# EAGLE board MCU_IOexpander_layout.PCB (EAGLE 9.6.2), part 1 of 2
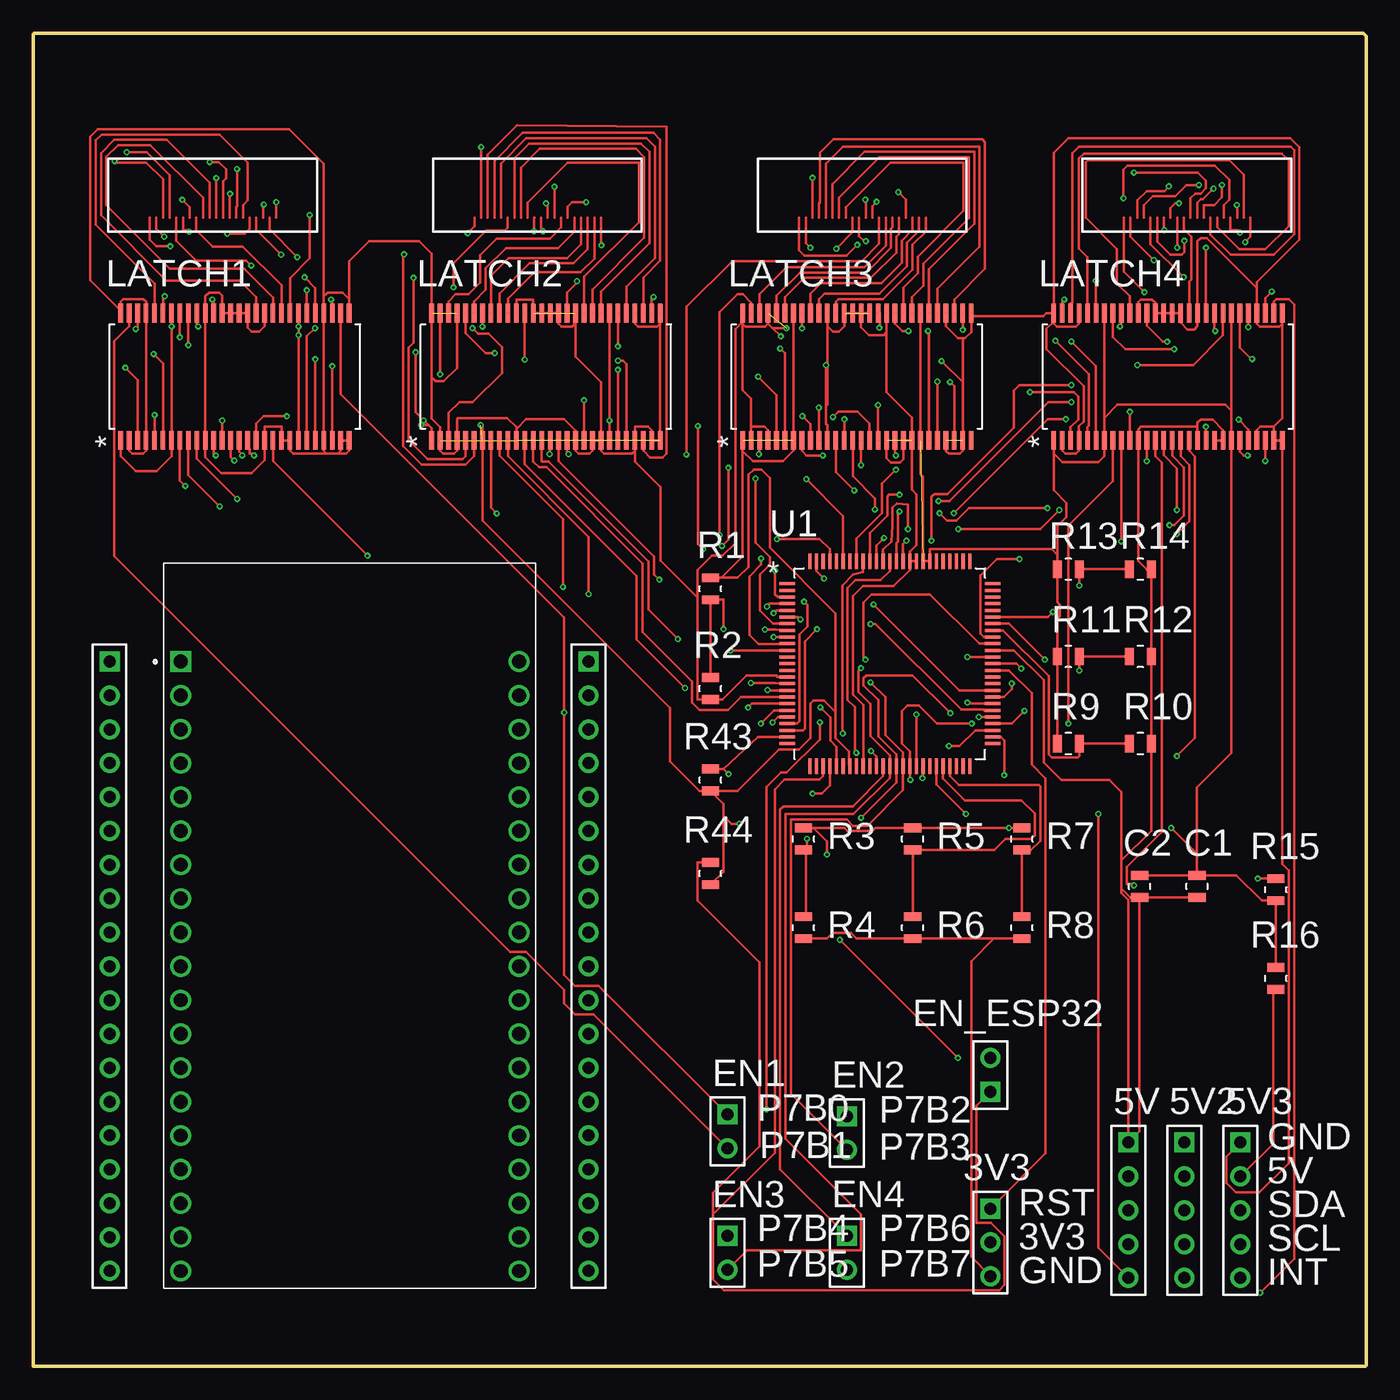
[diagram p0: board, top side]
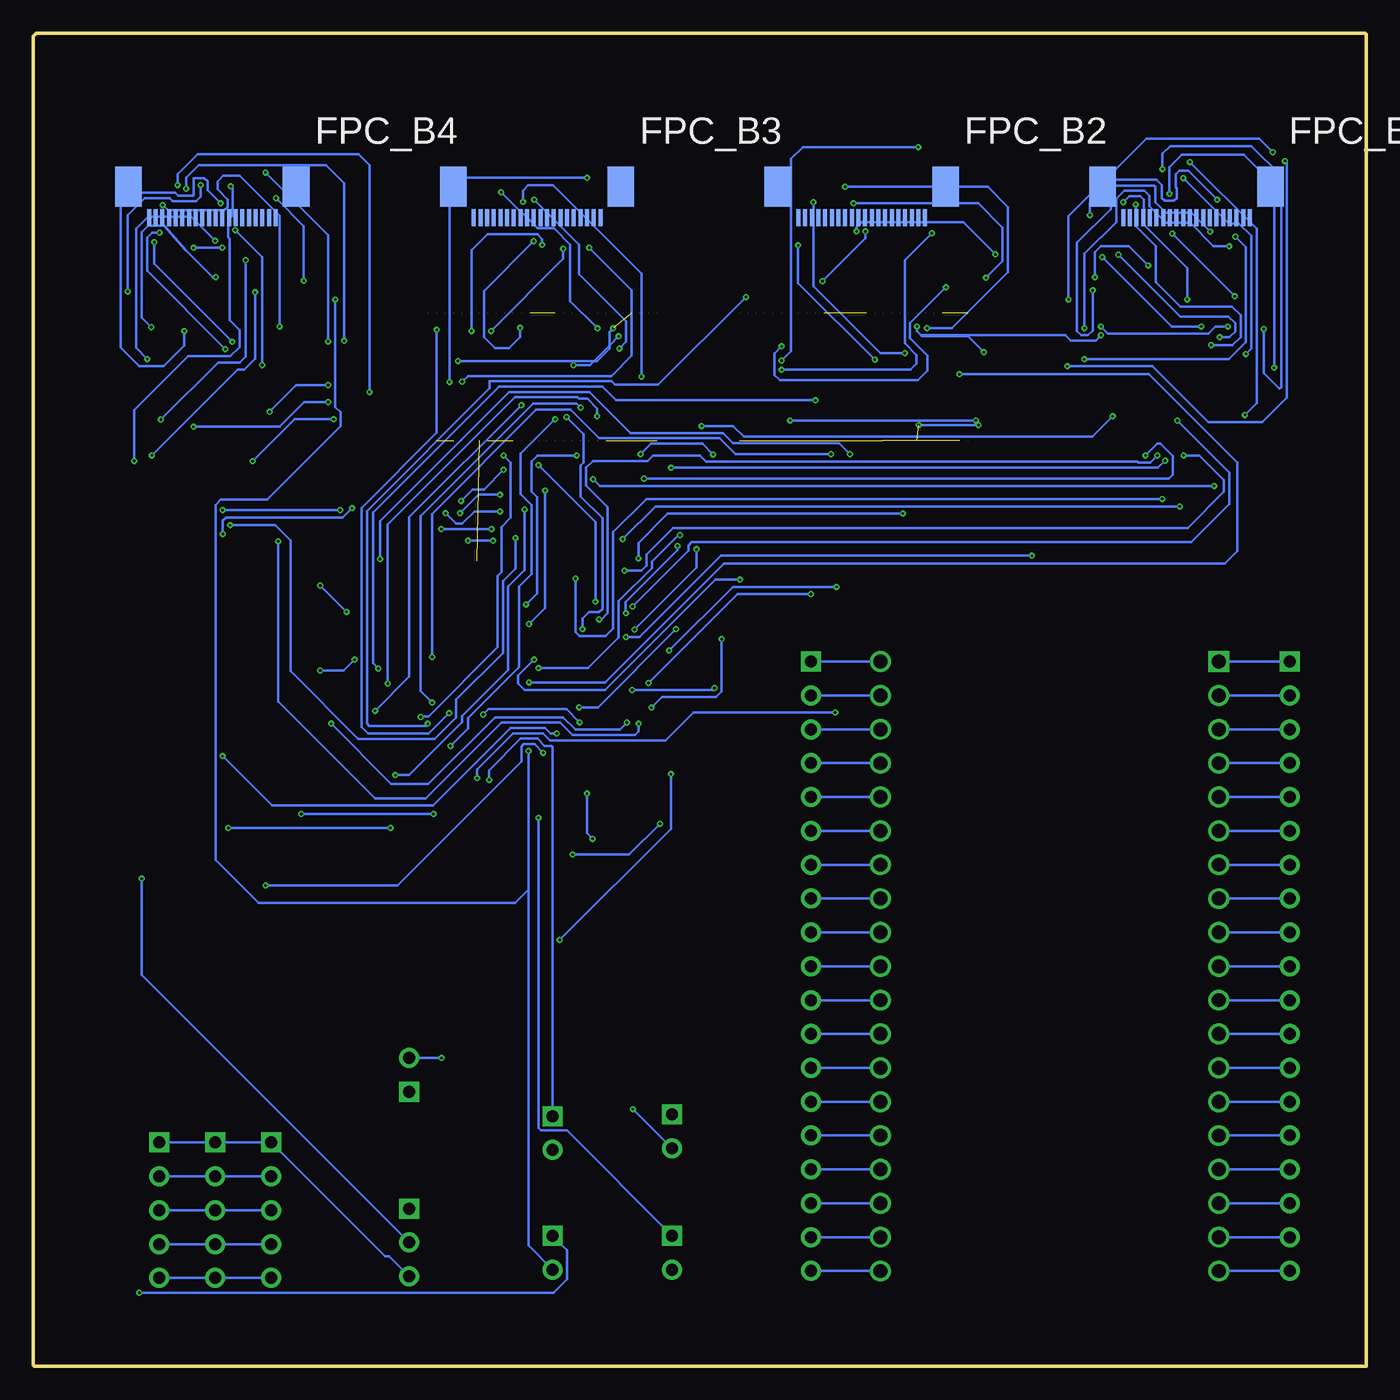
[diagram p1: board, bottom side, seen from below]

Size 100 x 100 mm. Coordinates in mm from the lower left corner, seen from the top.
Outline: 0,0 0,99.95 0.05,100 99.77,100 100,99.77 100,0.05 99.95,0 0,0
Copper layers (1*16): Top 0.035mm / dielectric 1.5mm / Bottom 0.035mm
Design rules "MCU_IOexpander_layout": minimum track width 6mil, minimum drill 0.35mm, track to track 6mil, track to pad 6mil, pad to pad 6mil, via to via 6mil, smd to smd 6mil, copper to edge 40mil, drill to drill 6mil, minimum pad ring 0mil, minimum via ring 0mil, stop-mask expansion 4mil, vias tented up to drill 0mil, thermal gap 10mil

## Footprints (pad centres in the part's own frame; a part is rotated, then mirrored left to right if it is on the bottom)
HDR1X3_1PRIMARY = drill 0.9 pad 1.5 square: 1 0,0 | drill 0.9 pad 1.5: 2 2.54,0; 3 5.08,0
HDR1X5_1PRIMARY = drill 0.9 pad 1.5 square: 1 0,0 | drill 0.9 pad 1.5: 2 2.54,0; 3 5.08,0; 4 7.62,0; 5 10.16,0
HDR1X5_2PRIMARY = drill 0.9 pad 1.5 square: 1 0,0 | drill 0.9 pad 1.5: 2 2.54,0; 3 5.08,0; 4 7.62,0; 5 10.16,0
RES_RC0805_YAG-L_1PRIMARY = smd 0.66 x 1.295: 1 -0.825,0; 2 0.826,0
HDR1X2_5PRIMARY = drill 0.9 pad 1.5 square: 1 0,0 | drill 0.9 pad 1.5: 2 2.54,0
HDR1X2_4PRIMARY = drill 0.9 pad 1.5 square: 1 0,0 | drill 0.9 pad 1.5: 2 2.54,0
HDR1X2_3PRIMARY = drill 0.9 pad 1.5 square: 1 0,0 | drill 0.9 pad 1.5: 2 2.54,0
HDR1X2_2PRIMARY = drill 0.9 pad 1.5 square: 1 0,0 | drill 0.9 pad 1.5: 2 2.54,0
HDR1X2_1PRIMARY = drill 0.9 pad 1.5 square: 1 0,0 | drill 0.9 pad 1.5: 2 2.54,0
HDR1X19_1PRIMARY = drill 0.9 pad 1.5 square: 1 0,0 | drill 0.9 pad 1.5: 2 2.54,0; 3 5.08,0; 4 7.62,0; 5 10.16,0; 6 12.7,0; 7 15.24,0; 8 17.78,0; 9 20.32,0; 10 22.86,0; 11 25.4,0; 12 27.94,0; 13 30.48,0; 14 33.02,0; 15 35.56,0; 16 38.1,0; 17 40.64,0; 18 43.18,0; 19 45.72,0
FPC_20PIN__B_4PRIMARY = smd 2 x 3: 1 -6.29,1.5; 2 6.29,1.5 | smd 0.3 x 1.25: 3 -4.75,3.825; 4 -4.25,3.825; 5 -3.75,3.825; 6 -3.25,3.825; 7 -2.75,3.825; 8 -2.25,3.825; 9 -1.75,3.825; 10 -1.25,3.825; 11 -0.75,3.825; 12 -0.25,3.825; 13 0.25,3.825; 14 0.75,3.825; 15 1.25,3.825; 16 1.75,3.825; 17 2.25,3.825; 18 2.75,3.825; 19 3.25,3.825; 20 3.75,3.825; 21 4.25,3.825; 22 4.75,3.825
FPC_20PIN__B_3PRIMARY = smd 2 x 3: 1 -6.29,1.5; 2 6.29,1.5 | smd 0.3 x 1.25: 3 -4.75,3.825; 4 -4.25,3.825; 5 -3.75,3.825; 6 -3.25,3.825; 7 -2.75,3.825; 8 -2.25,3.825; 9 -1.75,3.825; 10 -1.25,3.825; 11 -0.75,3.825; 12 -0.25,3.825; 13 0.25,3.825; 14 0.75,3.825; 15 1.25,3.825; 16 1.75,3.825; 17 2.25,3.825; 18 2.75,3.825; 19 3.25,3.825; 20 3.75,3.825; 21 4.25,3.825; 22 4.75,3.825
FPC_20PIN__B_2PRIMARY = smd 2 x 3: 1 -6.29,1.5; 2 6.29,1.5 | smd 0.3 x 1.25: 3 -4.75,3.825; 4 -4.25,3.825; 5 -3.75,3.825; 6 -3.25,3.825; 7 -2.75,3.825; 8 -2.25,3.825; 9 -1.75,3.825; 10 -1.25,3.825; 11 -0.75,3.825; 12 -0.25,3.825; 13 0.25,3.825; 14 0.75,3.825; 15 1.25,3.825; 16 1.75,3.825; 17 2.25,3.825; 18 2.75,3.825; 19 3.25,3.825; 20 3.75,3.825; 21 4.25,3.825; 22 4.75,3.825
FPC_20PIN__B_1PRIMARY = smd 2 x 3: 1 -6.29,1.5; 2 6.29,1.5 | smd 0.3 x 1.25: 3 -4.75,3.825; 4 -4.25,3.825; 5 -3.75,3.825; 6 -3.25,3.825; 7 -2.75,3.825; 8 -2.25,3.825; 9 -1.75,3.825; 10 -1.25,3.825; 11 -0.75,3.825; 12 -0.25,3.825; 13 0.25,3.825; 14 0.75,3.825; 15 1.25,3.825; 16 1.75,3.825; 17 2.25,3.825; 18 2.75,3.825; 19 3.25,3.825; 20 3.75,3.825; 21 4.25,3.825; 22 4.75,3.825
DL56-L_4PRIMARY = smd 1.416 x 0.356: 1 -4.776,8.572; 2 -4.776,7.937; 3 -4.776,7.302; 4 -4.776,6.667; 5 -4.776,6.032; 6 -4.776,5.397; 7 -4.776,4.762; 8 -4.776,4.127; 9 -4.776,3.492; 10 -4.776,2.857; 11 -4.776,2.222; 12 -4.776,1.587; 13 -4.776,0.952; 14 -4.776,0.317; 15 -4.776,-0.318; 16 -4.776,-0.953; 17 -4.776,-1.588; 18 -4.776,-2.223; 19 -4.776,-2.858; 20 -4.776,-3.493; 21 -4.776,-4.128; 22 -4.776,-4.763; 23 -4.776,-5.398; 24 -4.776,-6.033; 25 -4.776,-6.668; 26 -4.776,-7.303; 27 -4.776,-7.938; 28 -4.776,-8.573; 29 4.776,-8.573; 30 4.776,-7.938; 31 4.776,-7.303; 32 4.776,-6.668; 33 4.776,-6.033; 34 4.776,-5.398; 35 4.776,-4.763; 36 4.776,-4.128; 37 4.776,-3.493; 38 4.776,-2.858; 39 4.776,-2.223; 40 4.776,-1.588; 41 4.776,-0.953; 42 4.776,-0.318; 43 4.776,0.317; 44 4.776,0.952; 45 4.776,1.587; 46 4.776,2.222; 47 4.776,2.857; 48 4.776,3.492; 49 4.776,4.127; 50 4.776,4.762; 51 4.776,5.397; 52 4.776,6.032; 53 4.776,6.667; 54 4.776,7.302; 55 4.776,7.937; 56 4.776,8.572
DL56-L_3PRIMARY = smd 1.416 x 0.356: 1 -4.776,8.573; 2 -4.776,7.938; 3 -4.776,7.303; 4 -4.776,6.668; 5 -4.776,6.033; 6 -4.776,5.398; 7 -4.776,4.763; 8 -4.776,4.128; 9 -4.776,3.493; 10 -4.776,2.858; 11 -4.776,2.223; 12 -4.776,1.588; 13 -4.776,0.953; 14 -4.776,0.318; 15 -4.776,-0.317; 16 -4.776,-0.952; 17 -4.776,-1.587; 18 -4.776,-2.222; 19 -4.776,-2.857; 20 -4.776,-3.492; 21 -4.776,-4.127; 22 -4.776,-4.762; 23 -4.776,-5.397; 24 -4.776,-6.032; 25 -4.776,-6.667; 26 -4.776,-7.302; 27 -4.776,-7.937; 28 -4.776,-8.572; 29 4.776,-8.572; 30 4.776,-7.937; 31 4.776,-7.302; 32 4.776,-6.667; 33 4.776,-6.032; 34 4.776,-5.397; 35 4.776,-4.762; 36 4.776,-4.127; 37 4.776,-3.492; 38 4.776,-2.857; 39 4.776,-2.222; 40 4.776,-1.587; 41 4.776,-0.952; 42 4.776,-0.317; 43 4.776,0.318; 44 4.776,0.953; 45 4.776,1.588; 46 4.776,2.223; 47 4.776,2.858; 48 4.776,3.493; 49 4.776,4.128; 50 4.776,4.763; 51 4.776,5.398; 52 4.776,6.033; 53 4.776,6.668; 54 4.776,7.303; 55 4.776,7.938; 56 4.776,8.573
DL56-L_2PRIMARY = smd 1.416 x 0.356: 1 -4.776,8.572; 2 -4.776,7.937; 3 -4.776,7.302; 4 -4.776,6.667; 5 -4.776,6.032; 6 -4.776,5.397; 7 -4.776,4.762; 8 -4.776,4.127; 9 -4.776,3.492; 10 -4.776,2.857; 11 -4.776,2.222; 12 -4.776,1.587; 13 -4.776,0.952; 14 -4.776,0.317; 15 -4.776,-0.318; 16 -4.776,-0.953; 17 -4.776,-1.588; 18 -4.776,-2.223; 19 -4.776,-2.858; 20 -4.776,-3.493; 21 -4.776,-4.128; 22 -4.776,-4.763; 23 -4.776,-5.398; 24 -4.776,-6.033; 25 -4.776,-6.668; 26 -4.776,-7.303; 27 -4.776,-7.938; 28 -4.776,-8.573; 29 4.776,-8.573; 30 4.776,-7.938; 31 4.776,-7.303; 32 4.776,-6.668; 33 4.776,-6.033; 34 4.776,-5.398; 35 4.776,-4.763; 36 4.776,-4.128; 37 4.776,-3.493; 38 4.776,-2.858; 39 4.776,-2.223; 40 4.776,-1.588; 41 4.776,-0.953; 42 4.776,-0.318; 43 4.776,0.317; 44 4.776,0.952; 45 4.776,1.587; 46 4.776,2.222; 47 4.776,2.857; 48 4.776,3.492; 49 4.776,4.127; 50 4.776,4.762; 51 4.776,5.397; 52 4.776,6.032; 53 4.776,6.667; 54 4.776,7.302; 55 4.776,7.937; 56 4.776,8.572
DL56-L_1PRIMARY = smd 1.416 x 0.356: 1 -4.776,8.573; 2 -4.776,7.938; 3 -4.776,7.303; 4 -4.776,6.668; 5 -4.776,6.033; 6 -4.776,5.398; 7 -4.776,4.763; 8 -4.776,4.128; 9 -4.776,3.493; 10 -4.776,2.858; 11 -4.776,2.223; 12 -4.776,1.588; 13 -4.776,0.953; 14 -4.776,0.318; 15 -4.776,-0.317; 16 -4.776,-0.952; 17 -4.776,-1.587; 18 -4.776,-2.222; 19 -4.776,-2.857; 20 -4.776,-3.492; 21 -4.776,-4.127; 22 -4.776,-4.762; 23 -4.776,-5.397; 24 -4.776,-6.032; 25 -4.776,-6.667; 26 -4.776,-7.302; 27 -4.776,-7.937; 28 -4.776,-8.572; 29 4.776,-8.572; 30 4.776,-7.937; 31 4.776,-7.302; 32 4.776,-6.667; 33 4.776,-6.032; 34 4.776,-5.397; 35 4.776,-4.762; 36 4.776,-4.127; 37 4.776,-3.492; 38 4.776,-2.857; 39 4.776,-2.222; 40 4.776,-1.587; 41 4.776,-0.952; 42 4.776,-0.317; 43 4.776,0.318; 44 4.776,0.953; 45 4.776,1.588; 46 4.776,2.223; 47 4.776,2.858; 48 4.776,3.493; 49 4.776,4.128; 50 4.776,4.763; 51 4.776,5.398; 52 4.776,6.033; 53 4.776,6.668; 54 4.776,7.303; 55 4.776,7.938; 56 4.776,8.573
RES_RC0805_YAG-L_2PRIMARY = smd 0.66 x 1.295: 1 -0.825,0; 2 0.826,0
RES_RC0805_YAG-L_3PRIMARY = smd 0.66 x 1.295: 1 -0.826,0; 2 0.826,0
TQFP-100-L_1PRIMARY = smd 1.162 x 0.229: 1 -7.697,6; 2 -7.697,5.5; 3 -7.697,5; 4 -7.697,4.5; 5 -7.697,4; 6 -7.697,3.5; 7 -7.697,3; 8 -7.697,2.5; 9 -7.697,2; 10 -7.697,1.5; 11 -7.697,1; 12 -7.697,0.5; 13 -7.697,0; 14 -7.697,-0.5; 15 -7.697,-1; 16 -7.697,-1.5; 17 -7.697,-2; 18 -7.697,-2.5; 19 -7.697,-3; 20 -7.697,-3.5; 21 -7.697,-4; 22 -7.697,-4.5; 23 -7.697,-5; 24 -7.697,-5.5; 25 -7.697,-6; 51 7.697,-6; 52 7.697,-5.5; 53 7.697,-5; 54 7.697,-4.5; 55 7.697,-4; 56 7.697,-3.5; 57 7.697,-3; 58 7.697,-2.5; 59 7.697,-2; 60 7.697,-1.5; 61 7.697,-1; 62 7.697,-0.5; 63 7.697,0; 64 7.697,0.5; 65 7.697,1; 66 7.697,1.5; 67 7.697,2; 68 7.697,2.5; 69 7.697,3; 70 7.697,3.5; 71 7.697,4; 72 7.697,4.5; 73 7.697,5; 74 7.697,5.5; 75 7.697,6 | smd 0.229 x 1.162: 26 -6,-7.697; 27 -5.5,-7.697; 28 -5,-7.697; 29 -4.5,-7.697; 30 -4,-7.697; 31 -3.5,-7.697; 32 -3,-7.697; 33 -2.5,-7.697; 34 -2,-7.697; 35 -1.5,-7.697; 36 -1,-7.697; 37 -0.5,-7.697; 38 0,-7.697; 39 0.5,-7.697; 40 1,-7.697; 41 1.5,-7.697; 42 2,-7.697; 43 2.5,-7.697; 44 3,-7.697; 45 3.5,-7.697; 46 4,-7.697; 47 4.5,-7.697; 48 5,-7.697; 49 5.5,-7.697; 50 6,-7.697; 76 6,7.697; 77 5.5,7.697; 78 5,7.697; 79 4.5,7.697; 80 4,7.697; 81 3.5,7.697; 82 3,7.697; 83 2.5,7.697; 84 2,7.697; 85 1.5,7.697; 86 1,7.697; 87 0.5,7.697; 88 0,7.697; 89 -0.5,7.697; 90 -1,7.697; 91 -1.5,7.697; 92 -2,7.697; 93 -2.5,7.697; 94 -3,7.697; 95 -3.5,7.697; 96 -4,7.697; 97 -4.5,7.697; 98 -5,7.697; 99 -5.5,7.697; 100 -6,7.697
MODULE_ESP32-DEVKITC-32D_1PRIMARY = drill 1.04 pad 1.56 square: 1 -12.7,19.76 | drill 1.04 pad 1.56: 2 -12.7,17.22; 3 -12.7,14.68; 4 -12.7,12.14; 5 -12.7,9.6; 6 -12.7,7.06; 7 -12.7,4.52; 8 -12.7,1.98; 9 -12.7,-0.56; 10 -12.7,-3.1; 11 -12.7,-5.64; 12 -12.7,-8.18; 13 -12.7,-10.72; 14 -12.7,-13.26; 15 -12.7,-15.8; 16 -12.7,-18.34; 17 -12.7,-20.88; 18 -12.7,-23.42; 19 -12.7,-25.96; 20 12.7,19.76; 21 12.7,17.22; 22 12.7,14.68; 23 12.7,12.14; 24 12.7,9.6; 25 12.7,7.06; 26 12.7,4.52; 27 12.7,1.98; 28 12.7,-0.56; 29 12.7,-3.1; 30 12.7,-5.64; 31 12.7,-8.18; 32 12.7,-10.72; 33 12.7,-13.26; 34 12.7,-15.8; 35 12.7,-18.34; 36 12.7,-20.88; 37 12.7,-23.42; 38 12.7,-25.96

## Placement (x,y rotation side)
3V3  Header_3  [HDR1X3_1PRIMARY]  71.82,11.82 270 top
5V  Header_5  [HDR1X5_1PRIMARY]  82.17,16.78 270 top
5V2  Header_5  [HDR1X5_1PRIMARY]  86.36,16.78 270 top
5V3  Header_5  [HDR1X5_2PRIMARY]  90.56,16.78 270 top
C1  C0805  [RES_RC0805_YAG-L_1PRIMARY]  87.31,36 90 top
C2  C0805  [RES_RC0805_YAG-L_1PRIMARY]  82.99,36 90 top
EN1  Header_2  [HDR1X2_5PRIMARY]  52.07,18.88 270 top
EN2  Header_2  [HDR1X2_4PRIMARY]  61.04,18.75 270 top
EN3  Header_2  [HDR1X2_3PRIMARY]  52.07,9.78 270 top
EN4  Header_2  [HDR1X2_2PRIMARY]  61.04,9.78 270 top
EN_ESP32  Header_2  [HDR1X2_1PRIMARY]  71.82,20.57 90 top
EN_ESP?  Header_19  [HDR1X19_1PRIMARY]  41.66,52.86 270 top
EN_ESP?2  Header_19  [HDR1X19_1PRIMARY]  5.71,52.86 270 top
FPC_B1  FPC__20PIN_  [FPC_20PIN__B_4PRIMARY]  13.48,90 180 bottom
FPC_B2  *  [FPC_20PIN__B_3PRIMARY]  37.84,90 180 bottom
FPC_B3  *  [FPC_20PIN__B_2PRIMARY]  62.21,90 180 bottom
FPC_B4  *  [FPC_20PIN__B_1PRIMARY]  86.57,90 180 bottom
LATCH1  SN74ALVCH162260DLR  [DL56-L_4PRIMARY]  15.13,74.24 90 top
LATCH2  SN74ALVCH162260DLR  [DL56-L_3PRIMARY]  38.46,74.24 90 top
LATCH3  SN74ALVCH162260DLR  [DL56-L_2PRIMARY]  61.79,74.24 90 top
LATCH4  SN74ALVCH162260DLR  [DL56-L_1PRIMARY]  85.13,74.24 90 top
R1  RC0805FR-1310KL  [RES_RC0805_YAG-L_2PRIMARY]  50.8,58.33 90 top
R2  RC0805FR-1310KL  [RES_RC0805_YAG-L_2PRIMARY]  50.8,50.84 90 top
R3  RC0805FR-1310KL  [RES_RC0805_YAG-L_2PRIMARY]  57.78,39.56 90 top
R4  RC0805FR-1310KL  [RES_RC0805_YAG-L_2PRIMARY]  57.78,32.9 90 top
R5  RC0805FR-1310KL  [RES_RC0805_YAG-L_2PRIMARY]  65.98,39.56 90 top
R6  RC0805FR-1310KL  [RES_RC0805_YAG-L_2PRIMARY]  65.98,32.9 90 top
R7  RC0805FR-1310KL  [RES_RC0805_YAG-L_2PRIMARY]  74.17,39.56 90 top
R8  RC0805FR-1310KL  [RES_RC0805_YAG-L_2PRIMARY]  74.17,32.9 90 top
R9  RC0805FR-1310KL  [RES_RC0805_YAG-L_3PRIMARY]  77.66,46.71 180 top
R10  RC0805FR-1310KL  [RES_RC0805_YAG-L_3PRIMARY]  83.06,46.71 180 top
R11  RC0805FR-1310KL  [RES_RC0805_YAG-L_3PRIMARY]  77.66,53.25 180 top
R12  RC0805FR-1310KL  [RES_RC0805_YAG-L_3PRIMARY]  83.06,53.25 180 top
R13  RC0805FR-1310KL  [RES_RC0805_YAG-L_3PRIMARY]  77.66,59.79 180 top
R14  RC0805FR-1310KL  [RES_RC0805_YAG-L_3PRIMARY]  83.06,59.79 180 top
R15  RC0805FR-1310KL  [RES_RC0805_YAG-L_2PRIMARY]  93.22,35.75 90 top
R16  RC0805FR-1310KL  [RES_RC0805_YAG-L_2PRIMARY]  93.22,29.09 90 top
R43  RC0805FR-1310KL  [RES_RC0805_YAG-L_2PRIMARY]  50.8,43.98 90 top
R44  RC0805FR-1310KL  [RES_RC0805_YAG-L_1PRIMARY]  50.8,36.96 90 top
U1  CY8C9560A-24AXI  [TQFP-100-L_1PRIMARY]  64.26,52.7 0 top
U?  ESP32-DEVKITC-32D  [MODULE_ESP32-DEVKITC-32D_1PRIMARY]  23.75,33.1 0 top

## Library data of the parts
3V3 5V 5V2 5V3 C1 C2 EN1-EN4 EN_ESP32 EN_ESP? EN_ESP?2 FPC_B1-FPC_B4 LATCH1-LATCH4 R1-R16 R43 R44 U1 U? = MCU_IOexpander_layout

## Nets
3V3: 3V3.2 R15.2
5V: 5V2.2 5V3.2 5V.2 R16.1
A0: R1.1 R2.2 U1.30
FPC_1: FPC_B1.3 LATCH1.23
FPC_2: FPC_B1.4 LATCH1.24
FPC_3: FPC_B1.5 LATCH1.26
FPC_4: FPC_B1.6 LATCH1.31
FPC_5: FPC_B1.7 LATCH1.33
FPC_6: FPC_B1.8 LATCH1.34
FPC_7: FPC_B1.9 LATCH1.36
FPC_8: FPC_B1.10 LATCH1.37
FPC_9: FPC_B1.11 LATCH1.38
FPC_10: FPC_B1.12 LATCH1.40
FPC_11: FPC_B1.13 LATCH1.6
FPC_12: FPC_B1.14 LATCH1.5
FPC_13: FPC_B1.15 LATCH1.3
FPC_14: FPC_B1.16 LATCH1.54
FPC_15: FPC_B1.17 LATCH1.52
FPC_16: FPC_B1.18 LATCH1.51
FPC_17: FPC_B1.19 LATCH1.49
FPC_18: FPC_B1.20 LATCH1.48
FPC_19: FPC_B1.21 LATCH1.47
FPC_20: FPC_B1.22 LATCH1.45
FPC_21: FPC_B2.3 LATCH2.23
FPC_22: FPC_B2.4 LATCH2.24
FPC_23: FPC_B2.5 LATCH2.26
FPC_24: FPC_B2.6 LATCH2.31
FPC_25: FPC_B2.7 LATCH2.33
FPC_26: FPC_B2.8 LATCH2.34
FPC_27: FPC_B2.9 LATCH2.36
FPC_28: FPC_B2.10 LATCH2.37
FPC_29: FPC_B2.11 LATCH2.38
FPC_30: FPC_B2.12 LATCH2.40
FPC_31: FPC_B2.13 LATCH2.6
FPC_32: FPC_B2.14 LATCH2.5
FPC_33: FPC_B2.15 LATCH2.3
FPC_34: FPC_B2.16 LATCH2.54
FPC_35: FPC_B2.17 LATCH2.52
FPC_36: FPC_B2.18 LATCH2.51
FPC_37: FPC_B2.19 LATCH2.49
FPC_38: FPC_B2.20 LATCH2.48
FPC_39: FPC_B2.21 LATCH2.47
FPC_40: FPC_B2.22 LATCH2.45
FPC_41: FPC_B3.3 LATCH3.23
FPC_42: FPC_B3.4 LATCH3.24
FPC_43: FPC_B3.5 LATCH3.26
FPC_44: FPC_B3.6 LATCH3.31
FPC_45: FPC_B3.7 LATCH3.33
FPC_46: FPC_B3.8 LATCH3.34
FPC_47: FPC_B3.9 LATCH3.36
FPC_48: FPC_B3.10 LATCH3.37
FPC_49: FPC_B3.11 LATCH3.38
FPC_50: FPC_B3.12 LATCH3.40
FPC_51: FPC_B3.13 LATCH3.6
FPC_52: FPC_B3.14 LATCH3.5
FPC_53: FPC_B3.15 LATCH3.3
FPC_54: FPC_B3.16 LATCH3.54
FPC_55: FPC_B3.17 LATCH3.52
FPC_56: FPC_B3.18 LATCH3.51
FPC_57: FPC_B3.19 LATCH3.49
FPC_58: FPC_B3.20 LATCH3.48
FPC_59: FPC_B3.21 LATCH3.47
FPC_60: FPC_B3.22 LATCH3.45
FPC_61: FPC_B4.3 LATCH4.23
FPC_62: FPC_B4.4 LATCH4.24
FPC_63: FPC_B4.5 LATCH4.26
FPC_64: FPC_B4.6 LATCH4.31
FPC_65: FPC_B4.7 LATCH4.33
FPC_66: FPC_B4.8 LATCH4.34
FPC_67: FPC_B4.9 LATCH4.36
FPC_68: FPC_B4.10 LATCH4.37
FPC_69: FPC_B4.11 LATCH4.38
FPC_70: FPC_B4.12 LATCH4.40
FPC_71: FPC_B4.13 LATCH4.6
FPC_72: FPC_B4.14 LATCH4.5
FPC_73: FPC_B4.15 LATCH4.3
FPC_74: FPC_B4.16 LATCH4.54
FPC_75: FPC_B4.17 LATCH4.52
FPC_76: FPC_B4.18 LATCH4.51
FPC_77: FPC_B4.19 LATCH4.49
FPC_78: FPC_B4.20 LATCH4.48
FPC_79: FPC_B4.21 LATCH4.47
FPC_80: FPC_B4.22 LATCH4.45
GND: 3V3.3 5V2.1 5V3.1 5V.1 C1.1 C2.1 LATCH1.2 LATCH1.4 LATCH1.11 LATCH1.18 LATCH1.20 LATCH1.21 LATCH1.25 LATCH1.27 LATCH1.28 LATCH1.29 LATCH1.32 LATCH1.39 LATCH1.41 LATCH1.42 LATCH1.43 LATCH1.44 LATCH1.46 LATCH1.53 LATCH1.56 LATCH2.2 LATCH2.4 LATCH2.11 LATCH2.18 LATCH2.20 LATCH2.21 LATCH2.25 LATCH2.27 LATCH2.28 LATCH2.29 LATCH2.32 LATCH2.39 LATCH2.41 LATCH2.42 LATCH2.43 LATCH2.44 LATCH2.46 LATCH2.53 LATCH2.56 LATCH3.2 LATCH3.4 LATCH3.11 LATCH3.18 LATCH3.20 LATCH3.21 LATCH3.25 LATCH3.27 LATCH3.29 LATCH3.32 LATCH3.39 LATCH3.41 LATCH3.42 LATCH3.43 LATCH3.44 LATCH3.46 LATCH3.53 LATCH3.56 LATCH4.2 LATCH4.4 LATCH4.11 LATCH4.18 LATCH4.20 LATCH4.21 LATCH4.25 LATCH4.27 LATCH4.28 LATCH4.29 LATCH4.32 LATCH4.39 LATCH4.41 LATCH4.42 LATCH4.43 LATCH4.44 LATCH4.46 LATCH4.53 LATCH4.56 R2.1 R4.1 R6.1 R8.1 R10.1 R12.1 R14.1 U1.15 U1.34 U1.65 U1.84 U1.85
INT: 5V2.5 5V3.5 5V.5 U1.45
J2-1: EN_ESP?2.1 U?.1
J2-2: EN_ESP?2.2 U?.2
J2-3: EN_ESP?2.3 U?.3
J2-4: EN_ESP?2.4 U?.4
J2-5: EN_ESP?2.5 U?.5
J2-6: EN_ESP?2.6 U?.6
J2-7: EN_ESP?2.7 U?.7
J2-8: EN_ESP?2.8 U?.8
J2-9: EN_ESP?2.9 U?.9
J2-10: EN_ESP?2.10 U?.10
J2-11: EN_ESP?2.11 U?.11
J2-12: EN_ESP?2.12 U?.12
J2-13: EN_ESP?2.13 U?.13
J2-14: EN_ESP?2.14 U?.14
J2-15: EN_ESP?2.15 U?.15
J2-16: EN_ESP?2.16 U?.16
J2-17: EN_ESP?2.17 U?.17
J2-18: EN_ESP?2.18 U?.18
J2-19: EN_ESP?2.19 U?.19
J3-1: EN_ESP?.1 U?.20
J3-2: EN_ESP?.2 U?.21
J3-3: EN_ESP?.3 U?.22
J3-4: EN_ESP?.4 U?.23
J3-5: EN_ESP?.5 U?.24
J3-6: EN_ESP?.6 U?.25
J3-7: EN_ESP?.7 U?.26
J3-8: EN_ESP?.8 U?.27
J3-9: EN_ESP?.9 U?.28
J3-10: EN_ESP?.10 U?.29
J3-11: EN_ESP?.11 U?.30
J3-12: EN_ESP?.12 U?.31
J3-13: EN_ESP?.13 U?.32
J3-14: EN_ESP?.14 U?.33
J3-15: EN_ESP?.15 U?.34
J3-16: EN_ESP?.16 U?.35
J3-17: EN_ESP?.17 U?.36
J3-18: EN_ESP?.18 U?.37
J3-19: EN_ESP?.19 U?.38
NETEN_ESP32_1: EN_ESP32.1 R44.2 U1.28
NETEN_ESP32_2: EN_ESP32.2 R43.2 U1.24
P0B0: LATCH1.8 U1.95
P0B1: LATCH1.9 U1.97
P0B2: LATCH1.10 U1.99
P0B3: LATCH1.12 U1.3
P0B4: LATCH1.13 U1.4
P0B5: LATCH1.14 U1.5
P0B6: LATCH1.15 U1.6
P0B7: LATCH1.16 U1.7
P1B0: U1.81
P1B1: U1.79
P1B2: U1.77
P1B3: U1.74
P1B4: U1.72
P1B5: R13.1 R14.2 U1.70
P1B6: R11.1 R12.2 U1.69
P1B7: R9.1 R10.2 U1.68
P2B0: R7.1 R8.2 U1.47
P2B1: R5.1 R6.2 U1.46
P2B2: U1.44
P2B3: R3.1 R4.2 U1.29
P3B0: LATCH1.17 U1.8
P3B1: LATCH1.19 U1.9
P3B2: LATCH2.8 U1.10
P3B3: LATCH2.9 U1.11
P3B4: LATCH2.10 U1.16
P3B5: LATCH2.12 U1.17
P3B6: LATCH2.13 U1.18
P3B7: LATCH2.14 U1.19
P4B0: LATCH2.15 U1.67
P4B1: LATCH2.16 U1.66
P4B2: LATCH2.17 U1.64
P4B3: LATCH2.19 U1.63
P4B4: LATCH3.8 U1.59
P4B5: LATCH3.9 U1.58
P4B6: LATCH3.10 U1.57
P4B7: LATCH3.12 U1.56
P5B0: LATCH3.13 U1.53
P5B1: LATCH3.14 U1.52
P5B2: LATCH3.15 U1.22
P5B3: LATCH3.16 U1.23
P5B4: LATCH3.17 U1.54
P5B5: LATCH3.19 U1.55
P5B6: LATCH4.8 U1.21
P5B7: LATCH4.9 U1.20
P6B0: LATCH4.10 U1.86
P6B1: LATCH4.12 U1.87
P6B2: LATCH4.13 U1.88
P6B3: LATCH4.14 U1.89
P6B4: LATCH4.15 U1.90
P6B5: LATCH4.16 U1.91
P6B6: LATCH4.17 U1.92
P6B7: LATCH4.19 U1.93
P7B0: EN1.1 LATCH1.30 U1.43
P7B1: EN1.2 LATCH1.55 U1.42
P7B2: EN2.1 LATCH2.30 U1.41
P7B3: EN2.2 LATCH2.55 U1.40
P7B4: EN3.1 LATCH3.30 U1.39
P7B5: EN3.2 LATCH3.55 U1.38
P7B6: EN4.1 LATCH4.30 U1.37
P7B7: EN4.2 LATCH4.55 U1.36
RST: 3V3.1 U1.62
SCL: 5V2.4 5V3.4 5V.4
SDA: 5V2.3 5V3.3 5V.3
VDD: C1.2 C2.2 LATCH1.1 LATCH1.7 LATCH1.22 LATCH1.35 LATCH1.50 LATCH2.1 LATCH2.7 LATCH2.22 LATCH2.35 LATCH2.50 LATCH3.1 LATCH3.7 LATCH3.22 LATCH3.35 LATCH3.50 LATCH4.1 LATCH4.7 LATCH4.22 LATCH4.35 LATCH4.50 R1.2 R3.2 R5.2 R7.2 R9.2 R11.2 R13.2 R15.1 R16.2 R43.1 R44.1 U1.32 U1.82 U1.83